# Altium PCB PCBModuleM02.PcbDoc (part 1 of 2)
Units mm, origin at the board's own origin, x right, y up, seen from the top; angles counter-clockwise.
Board outline 149.86 x 99.06 mm, 2 copper layers (Top Layer, Bottom Layer); 167 components, 166 nets, 568 pads, 73 vias.
Unrouted connection lines stored in the file: 37.
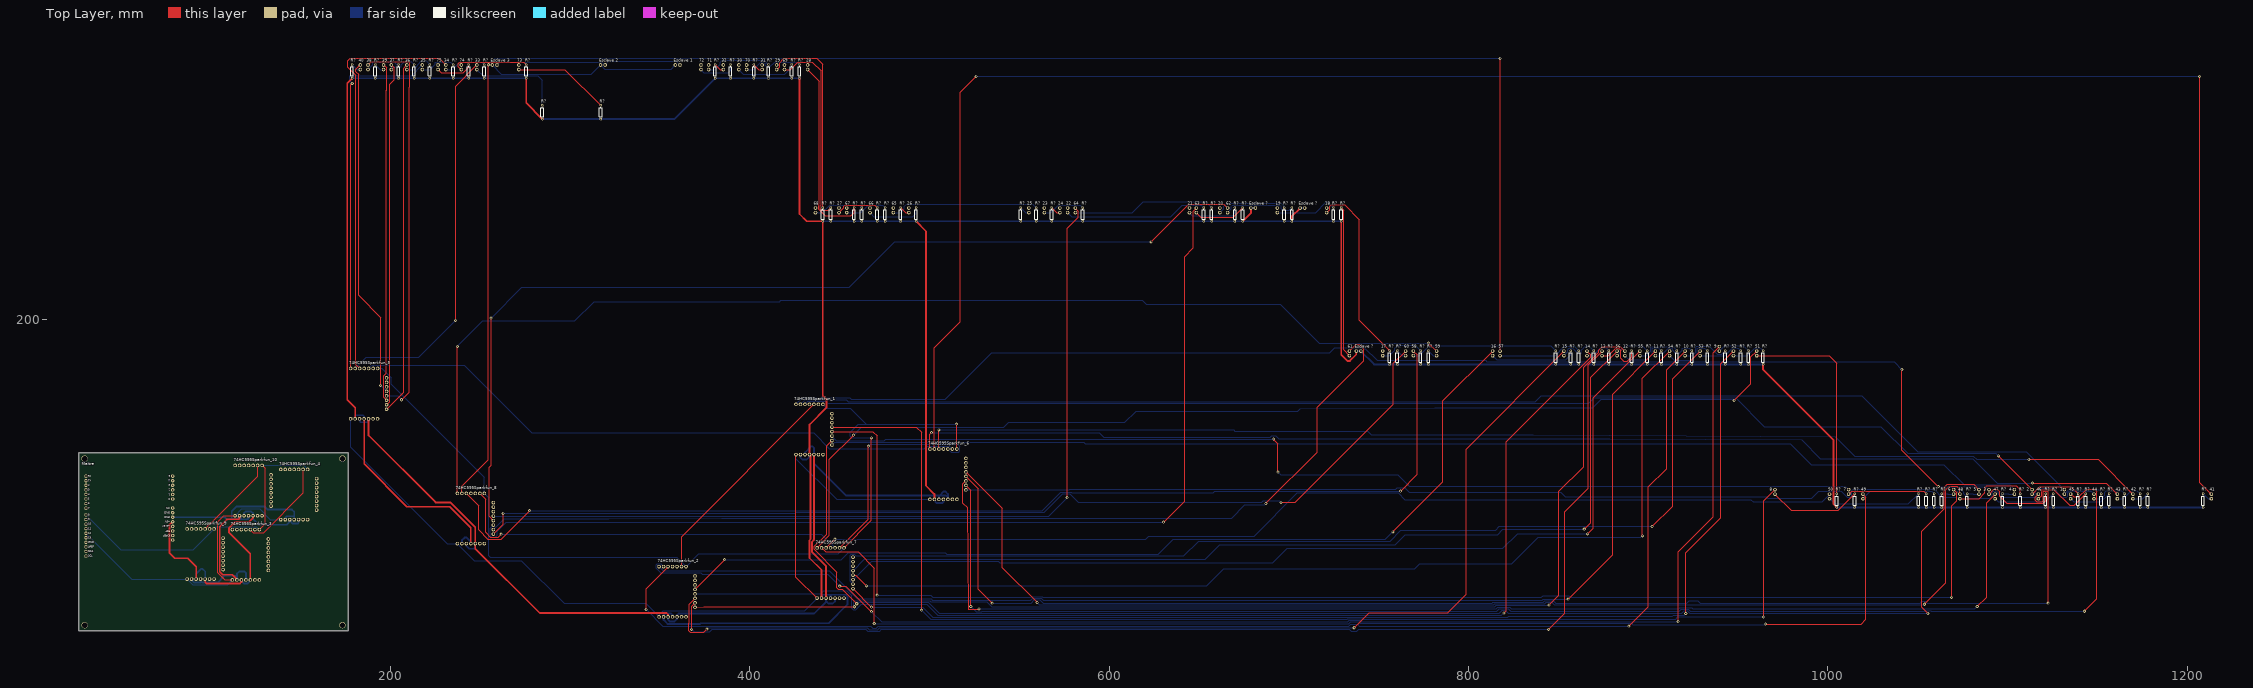
[diagram p0: Top Layer view]
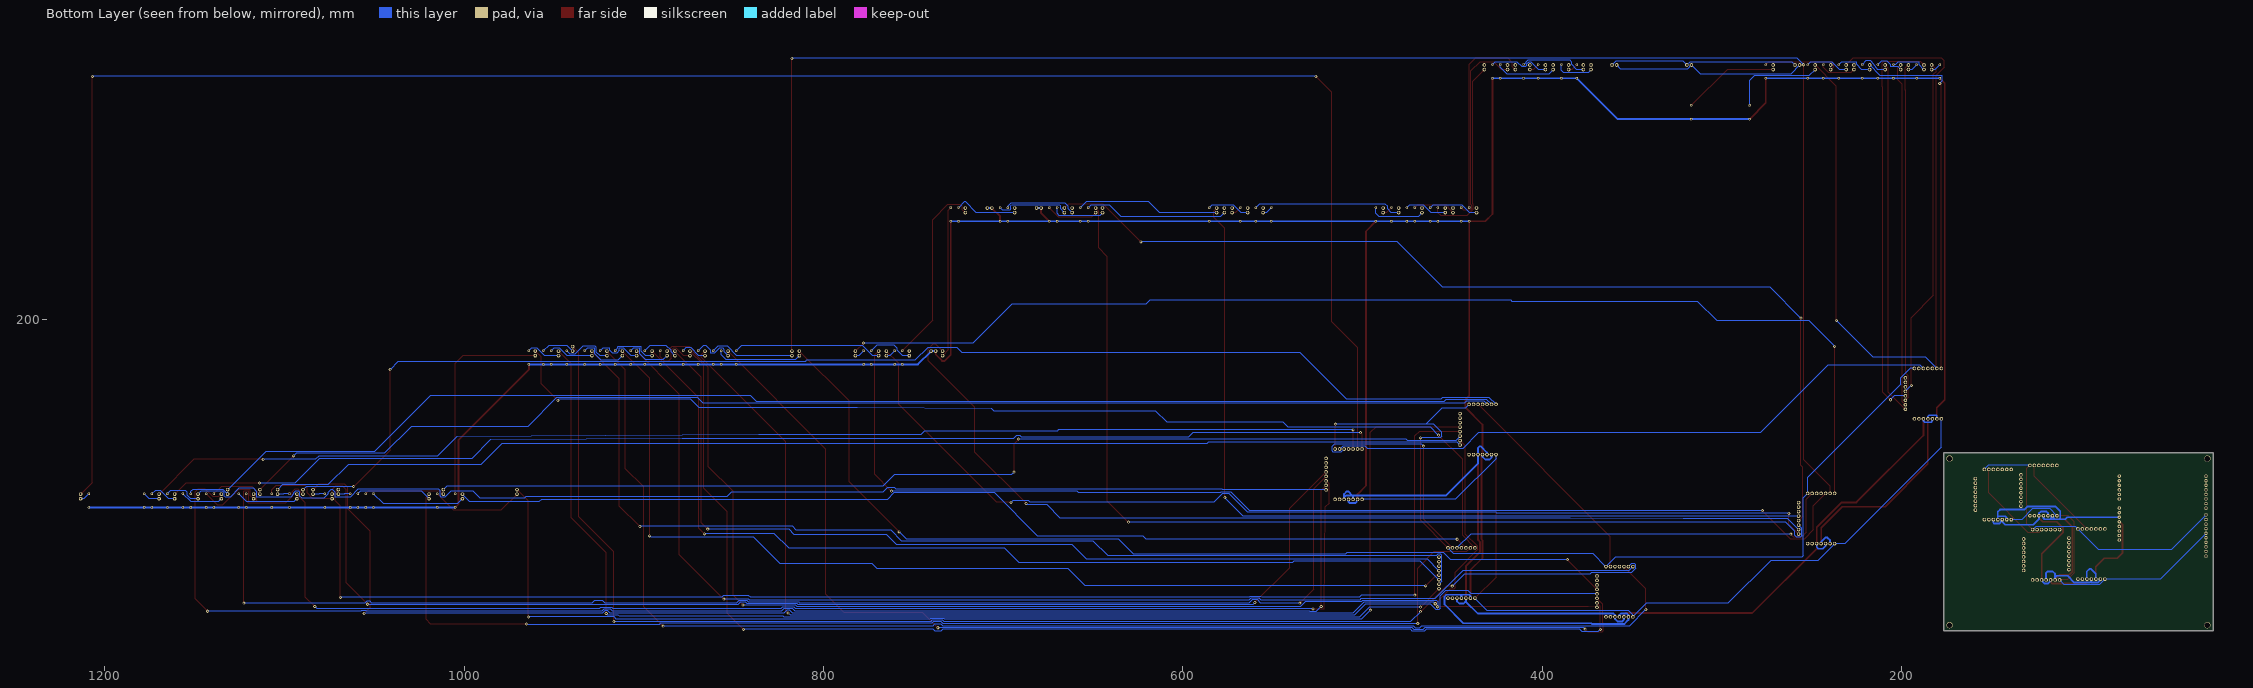
[diagram p1: Bottom Layer view, seen from below]

## Layer stack, top to bottom
Top Solder: solder mask 0.0102, Solder Resist, Dk 3.5
Top Layer: signal copper 0.0356
Dielectric 1: dielectric 0.32, FR-4, Dk 4.8
Bottom Layer: signal copper 0.0356
Bottom Solder: solder mask 0.0102, Solder Resist, Dk 3.5

## Board outline
26.67,26.67 176.53,26.67 176.53,125.73 26.67,125.73

## Design rules (kind name [scope] priority, off if disabled: settings)
Clearance Clearance_plan [(InPoly)] p1: gap=1.1
Clearance [All] p2: gap=0.4
PolygonConnect [All] p1: connectstyle=Relief reliefconductorwidth=0.254 reliefentries=4 polygonreliefangle="90 Angle" airgapwidth=0.254
RoutingVias [All] p1: holewidth=0.8 width=1.7 viastyle="Through Hole" minholewidth=0.8 minwidth=1.7 maxholewidth=0.8 maxwidth=1.7
SolderMaskExpansion [All] p1: expansion=0.102
Width Width_Puissance [(InNet('VCC') OR InNet('GND'))] p1: maxlimit=2 minlimit=1 preferedwidth=1
Width [All] p2: maxlimit=0.5 minlimit=0.4 preferedwidth=0.5
30 further rules are at their usual default settings.

## Classes and differential pairs
component class SchemaM02: 1 2 3 4 5 6 7 8 9 10 11 12 13 14 15 16 17 18 19 20 21 22 23 24 25 26 27 28 29 30 31 32 33 34 35 36 37 38 39 40 41 42 43 44 45 46 47 48 49 50 51 52 53 54 55 56 57 58 59 60 61 62 63 64 65 66 67 68 69 70 71 72 73 74 74HC595Sparkfun_1 74HC595Sparkfun_2 74HC595Sparkfun_3 74HC595Sparkfun_4 74HC595Sparkfun_5 74HC595Sparkfun_6 74HC595Sparkfun_7 74HC595Sparkfun_8 74HC595Sparkfun_9 74HC595Sparkfun_10 75 "Esclave 1" "Esclave 2" "Esclave 3" "Esclave ?" Maître R?

## Components (designator, comment, footprint, x,y, rotation, side; value= is the part's Value field where it differs from the comment)
1 "Embase_CI_2_contacts" Embase_CI_2_contacts 1131.697,102.743 r0 top
2 "Embase_CI_2_contacts" Embase_CI_2_contacts 1113.79,102.743 r0 top
3 "Embase_CI_2_contacts" Embase_CI_2_contacts 1089.787,102.743 r0 top
4 "Embase_CI_2_contacts" Embase_CI_2_contacts 1103.884,102.743 r0 top
5 "Embase_CI_2_contacts" Embase_CI_2_contacts 1084.199,102.743 r0 top
6 "Embase_CI_2_contacts" Embase_CI_2_contacts 1070.102,102.743 r0 top
7 "Embase_CI_2_contacts" Embase_CI_2_contacts 1011.682,102.743 r0 top
8 "Embase_CI_2_contacts" Embase_CI_2_contacts 970.661,102.743 r0 top
9 "Embase_CI_2_contacts" Embase_CI_2_contacts 939.673,182.372 r0 top
10 "Embase_CI_2_contacts" Embase_CI_2_contacts 920.623,179.832 r0 top
11 "Embase_CI_2_contacts" Embase_CI_2_contacts 904.113,179.832 r0 top
12 "Embase_CI_2_contacts" Embase_CI_2_contacts 887.095,179.832 r0 top
13 "Embase_CI_2_contacts" Embase_CI_2_contacts 874.395,179.832 r0 top
14 "Embase_CI_2_contacts" Embase_CI_2_contacts 866.013,179.832 r0 top
15 "Embase_CI_2_contacts" Embase_CI_2_contacts 853.186,179.832 r0 top
16 "Embase_CI_2_contacts" Embase_CI_2_contacts 813.562,179.832 r0 top
17 "Embase_CI_2_contacts" Embase_CI_2_contacts 752.348,179.832 r0 top
18 "Embase_CI_2_contacts" Embase_CI_2_contacts 721.106,259.461 r0 top
19 "Embase_CI_2_contacts" Embase_CI_2_contacts 693.674,259.461 r0 top
20 "Embase_CI_2_contacts" Embase_CI_2_contacts 661.67,259.461 r0 top
21 "Embase_CI_2_contacts" Embase_CI_2_contacts 644.779,259.461 r0 top
22 "Embase_CI_2_contacts" Embase_CI_2_contacts 576.961,259.461 r0 top
23 "Embase_CI_2_contacts" Embase_CI_2_contacts 564.007,259.461 r0 top
24 "Embase_CI_2_contacts" Embase_CI_2_contacts 572.643,259.461 r0 top
25 "Embase_CI_2_contacts" Embase_CI_2_contacts 555.371,259.461 r0 top
26 "Embase_CI_2_contacts" Embase_CI_2_contacts 488.569,259.461 r0 top
27 "Embase_CI_2_contacts" Embase_CI_2_contacts 449.707,259.461 r0 top
28 "Embase_CI_2_contacts" Embase_CI_2_contacts 432.308,339.09 r0 top
29 "Embase_CI_2_contacts" Embase_CI_2_contacts 415.036,339.09 r0 top
30 "Embase_CI_2_contacts" Embase_CI_2_contacts 393.954,339.09 r0 top
31 "Embase_CI_2_contacts" Embase_CI_2_contacts 406.908,339.09 r0 top
32 "Embase_CI_2_contacts" Embase_CI_2_contacts 385.318,339.09 r0 top
33 "Embase_CI_2_contacts" Embase_CI_2_contacts 248.158,339.09 r0 top
34 "Embase_CI_2_contacts" Embase_CI_2_contacts 230.886,339.09 r0 top
35 "Embase_CI_2_contacts" Embase_CI_2_contacts 217.805,339.09 r0 top
36 "Embase_CI_2_contacts" Embase_CI_2_contacts 209.169,339.09 r0 top
37 "Embase_CI_2_contacts" Embase_CI_2_contacts 200.533,339.09 r0 top
38 "Embase_CI_2_contacts" Embase_CI_2_contacts 187.579,339.09 r0 top
39 "Embase_CI_2_contacts" Embase_CI_2_contacts 196.215,339.09 r0 top
40 "Embase_CI_2_contacts" Embase_CI_2_contacts 183.261,339.09 r0 top
41 "Embase_CI_2_contacts" Embase_CI_2_contacts 1213.485,100.203 r0 top
42 "Embase_CI_2_contacts" Embase_CI_2_contacts 1169.797,100.203 r0 top
43 "Embase_CI_2_contacts" Embase_CI_2_contacts 1161.161,100.203 r0 top
44 "Embase_CI_2_contacts" Embase_CI_2_contacts 1148.207,100.203 r0 top
45 "Embase_CI_2_contacts" Embase_CI_2_contacts 1135.253,100.203 r0 top
46 "Embase_CI_2_contacts" Embase_CI_2_contacts 1117.219,100.203 r0 top
47 "Embase_CI_2_contacts" Embase_CI_2_contacts 1093.216,100.203 r0 top
48 "Embase_CI_2_contacts" Embase_CI_2_contacts 1073.531,100.203 r0 top
49 "Embase_CI_2_contacts" Embase_CI_2_contacts 1019.556,100.203 r0 top
50 "Embase_CI_2_contacts" Embase_CI_2_contacts 1001.014,100.203 r0 top
51 "Embase_CI_2_contacts" Embase_CI_2_contacts 960.501,179.832 r0 top
52 "Embase_CI_2_contacts" Embase_CI_2_contacts 947.547,179.832 r0 top
53 "Embase_CI_2_contacts" Embase_CI_2_contacts 929.005,179.832 r0 top
54 "Embase_CI_2_contacts" Embase_CI_2_contacts 911.987,179.832 r0 top
55 "Embase_CI_2_contacts" Embase_CI_2_contacts 895.477,179.832 r0 top
56 "Embase_CI_2_contacts" Embase_CI_2_contacts 882.777,179.832 r0 top
57 "Embase_CI_2_contacts" Embase_CI_2_contacts 817.626,179.832 r0 top
58 "Embase_CI_2_contacts" Embase_CI_2_contacts 769.366,179.832 r0 top
59 "Embase_CI_2_contacts" Embase_CI_2_contacts 782.32,179.832 r0 top
60 "Embase_CI_2_contacts" Embase_CI_2_contacts 765.048,179.832 r0 top
61 "Embase_CI_2_contacts" Embase_CI_2_contacts 733.806,179.832 r0 top
62 "Embase_CI_2_contacts" Embase_CI_2_contacts 665.988,259.461 r0 top
63 "Embase_CI_2_contacts" Embase_CI_2_contacts 648.589,259.461 r0 top
64 "Embase_CI_2_contacts" Embase_CI_2_contacts 581.279,259.461 r0 top
65 "Embase_CI_2_contacts" Embase_CI_2_contacts 479.933,259.461 r0 top
66 "Embase_CI_2_contacts" Embase_CI_2_contacts 466.979,259.461 r0 top
67 "Embase_CI_2_contacts" Embase_CI_2_contacts 454.025,259.461 r0 top
68 "Embase_CI_2_contacts" Embase_CI_2_contacts 436.626,259.461 r0 top
69 "Embase_CI_2_contacts" Embase_CI_2_contacts 419.354,339.09 r0 top
70 "Embase_CI_2_contacts" Embase_CI_2_contacts 398.272,339.09 r0 top
71 "Embase_CI_2_contacts" Embase_CI_2_contacts 377.19,339.09 r0 top
72 "Embase_CI_2_contacts" Embase_CI_2_contacts 372.872,339.09 r0 top
73 "Embase_CI_2_contacts" Embase_CI_2_contacts 271.526,339.09 r0 top
74 "Embase_CI_2_contacts" Embase_CI_2_contacts 239.522,339.09 r0 top
74HC595Sparkfun_1 "74HC595" 74HC595 440.77,124.781 r90 top
74HC595Sparkfun_2 "74HC595" 74HC595 364.57,34.444 r90 top
74HC595Sparkfun_3 "74HC595" 74HC595 127.08,55.018 r90 top
74HC595Sparkfun_4 "74HC595" 74HC595 154.004,88.546 r90 top
74HC595Sparkfun_5 "74HC595" 74HC595 192.92,144.72 r90 top
74HC595Sparkfun_6 "74HC595" 74HC595 515.319,99.889 r90 top
74HC595Sparkfun_7 "74HC595" 74HC595 452.508,44.898 r90 top
74HC595Sparkfun_8 "74HC595" 74HC595 252.302,75.211 r90 top
74HC595Sparkfun_9 "74HC595" 74HC595 101.934,55.439 r90 top
74HC595Sparkfun_10 "74HC595" 74HC595 128.618,90.745 r90 top
75 "Embase_CI_2_contacts" Embase_CI_2_contacts 226.568,339.09 r0 top
"Esclave 1" "Embase_CI_2_contacts" Embase_CI_2_contacts 361.188,341.63 r90 top
"Esclave 2" "Embase_CI_2_contacts" Embase_CI_2_contacts 319.532,341.63 r90 top
"Esclave 3" "Embase_CI_2_contacts" Embase_CI_2_contacts 259.334,341.63 r90 top
"Esclave ?" "Embase_CI_2_contacts" Embase_CI_2_contacts 740.156,182.372 r90 top (schematic designator "Esclave 4")
"Esclave ?" "Embase_CI_2_contacts" Embase_CI_2_contacts 681.482,262.001 r90 top (schematic designator "Esclave 6")
"Esclave ?" "Embase_CI_2_contacts" Embase_CI_2_contacts 708.914,262.001 r90 top (schematic designator "Esclave 5")
Maître "Arduino" UNO_R3_SHIELD 28.067,58.166 r0 top
R? "Res1" AXIAL-0.3 440.69,258.445 r90 top (schematic designator R29)
R? "Res1" AXIAL-0.3 458.089,258.445 r90 top (schematic designator R28)
R? "Res1" AXIAL-0.3 471.043,258.445 r90 top (schematic designator R27)
R? "Res1" AXIAL-0.3 483.997,258.445 r90 top (schematic designator R26)
R? "Res1" AXIAL-0.3 550.799,258.445 r90 top (schematic designator R25)
R? "Res1" AXIAL-0.3 568.071,258.445 r90 top (schematic designator R24)
R? "Res1" AXIAL-0.3 585.343,258.445 r90 top (schematic designator R23)
R? "Res1" AXIAL-0.3 652.78,258.445 r90 top (schematic designator R22)
R? "Res1" AXIAL-0.3 670.052,258.445 r90 top (schematic designator R21)
R? "Res1" AXIAL-0.3 916.051,178.816 r90 top (schematic designator R55)
R? "Res1" AXIAL-0.3 933.069,178.816 r90 top (schematic designator R54)
R? "Res1" AXIAL-0.3 951.611,178.816 r90 top (schematic designator R53)
R? "Res1" AXIAL-0.3 964.057,178.816 r90 top (schematic designator R52)
R? "Res1" AXIAL-0.3 1005.078,99.187 r90 top (schematic designator R51)
R? "Res1" AXIAL-0.3 1050.544,99.187 r90 top (schematic designator R50)
R? "Res1" AXIAL-0.3 1059.18,99.187 r90 top (schematic designator R49)
R? "Res1" AXIAL-0.3 1107.186,99.187 r90 top (schematic designator R48)
R? "Res1" AXIAL-0.3 1125.601,99.187 r90 top (schematic designator R47)
R? "Res1" AXIAL-0.3 1143.635,99.187 r90 top (schematic designator R46)
R? "Res1" AXIAL-0.3 1156.589,99.187 r90 top (schematic designator R45)
R? "Res1" AXIAL-0.3 1165.225,99.187 r90 top (schematic designator R44)
R? "Res1" AXIAL-0.3 1173.861,99.187 r90 top (schematic designator R43)
R? "Res1" AXIAL-0.3 1178.179,99.187 r90 top (schematic designator R42)
R? "Res1" AXIAL-0.3 1208.913,99.187 r90 top (schematic designator R41)
R? "Res1" AXIAL-0.3 178.689,338.074 r90 top (schematic designator R40)
R? "Res1" AXIAL-0.3 191.643,338.074 r90 top (schematic designator R39)
R? "Res1" AXIAL-0.3 204.597,338.074 r90 top (schematic designator R38)
R? "Res1" AXIAL-0.3 213.233,338.074 r90 top (schematic designator R37)
R? "Res1" AXIAL-0.3 221.996,338.074 r90 top (schematic designator R36)
R? "Res1" AXIAL-0.3 243.586,338.074 r90 top (schematic designator R75)
R? "Res1" AXIAL-0.3 275.59,338.074 r90 top (schematic designator R74)
R? "Res1" AXIAL-0.3 317.119,315.341 r90 top (schematic designator R73)
R? "Res1" AXIAL-0.3 389.382,338.074 r90 top (schematic designator R72)
R? "Res1" AXIAL-0.3 410.464,338.074 r90 top (schematic designator R71)
R? "Res1" AXIAL-0.3 427.736,338.074 r90 top (schematic designator R70)
R? "Res1" AXIAL-0.3 445.135,258.445 r90 top (schematic designator R69)
R? "Res1" AXIAL-0.3 462.407,258.445 r90 top (schematic designator R68)
R? "Res1" AXIAL-0.3 475.361,258.445 r90 top (schematic designator R67)
R? "Res1" AXIAL-0.3 492.633,258.445 r90 top (schematic designator R66)
R? "Res1" AXIAL-0.3 559.435,258.445 r90 top (schematic designator R65)
R? "Res1" AXIAL-0.3 657.098,258.445 r90 top (schematic designator R64)
R? "Res1" AXIAL-0.3 674.37,258.445 r90 top (schematic designator R63)
R? "Res1" AXIAL-0.3 701.802,258.445 r90 top (schematic designator R62)
R? "Res1" AXIAL-0.3 729.234,258.445 r90 top (schematic designator R61)
R? "Res1" AXIAL-0.3 760.476,178.816 r90 top (schematic designator R60)
R? "Res1" AXIAL-0.3 777.748,178.816 r90 top (schematic designator R59)
R? "Res1" AXIAL-0.3 848.614,178.816 r90 top (schematic designator R58)
R? "Res1" AXIAL-0.3 861.441,178.816 r90 top (schematic designator R57)
R? "Res1" AXIAL-0.3 899.541,178.816 r90 top (schematic designator R56)
R? "Res1" AXIAL-0.3 697.484,258.445 r90 top (schematic designator R20)
R? "Res1" AXIAL-0.3 724.916,258.445 r90 top (schematic designator R19)
R? "Res1" AXIAL-0.3 756.158,178.816 r90 top (schematic designator R18)
R? "Res1" AXIAL-0.3 773.43,178.816 r90 top (schematic designator R17)
R? "Res1" AXIAL-0.3 856.996,178.816 r90 top (schematic designator R16)
R? "Res1" AXIAL-0.3 869.823,178.816 r90 top (schematic designator R15)
R? "Res1" AXIAL-0.3 878.205,178.816 r90 top (schematic designator R14)
R? "Res1" AXIAL-0.3 890.905,178.816 r90 top (schematic designator R13)
R? "Res1" AXIAL-0.3 907.415,178.816 r90 top (schematic designator R12)
R? "Res1" AXIAL-0.3 924.433,178.816 r90 top (schematic designator R11)
R? "Res1" AXIAL-0.3 942.975,178.816 r90 top (schematic designator R10)
R? "Res1" AXIAL-0.3 955.929,178.816 r90 top (schematic designator R9)
R? "Res1" AXIAL-0.3 1014.984,99.187 r90 top (schematic designator R8)
R? "Res1" AXIAL-0.3 1054.862,99.187 r90 top (schematic designator R7)
R? "Res1" AXIAL-0.3 1063.498,99.187 r90 top (schematic designator R6)
R? "Res1" AXIAL-0.3 1077.595,99.187 r90 top (schematic designator R5)
R? "Res1" AXIAL-0.3 1097.28,99.187 r90 top (schematic designator R4)
R? "Res1" AXIAL-0.3 1121.283,99.187 r90 top (schematic designator R3)
R? "Res1" AXIAL-0.3 1139.317,99.187 r90 top (schematic designator R2)
R? "Res1" AXIAL-0.3 1152.271,99.187 r90 top (schematic designator R1)
R? "Res1" AXIAL-0.3 234.95,338.074 r90 top (schematic designator R35)
R? "Res1" AXIAL-0.3 252.222,338.074 r90 top (schematic designator R34)
R? "Res1" AXIAL-0.3 284.607,315.341 r90 top (schematic designator R33)
R? "Res1" AXIAL-0.3 380.746,338.074 r90 top (schematic designator R32)
R? "Res1" AXIAL-0.3 402.336,338.074 r90 top (schematic designator R31)
R? "Res1" AXIAL-0.3 423.418,338.074 r90 top (schematic designator R30)

## Footprints (in the part's own frame and the unit in brackets; to place one, negate y for a bottom-side part, rotate by r counter-clockwise, add the part's x,y. Pads: shape width x height; smd on the part's side, far side on the other; paste and mask are expansions set on the pad)
74HC595 [mm]
  round 2 hole 1.1: 1(0,0) 2(0,2.5) 3(0,5) 4(0,7.5) 5(0,10) 6(0,12.5) 7(0,15) 8(28,0) 9(28,2.5) 10(28,5) 11(28,7.5) 12(28,10) 13(28,12.5) 14(28,15) 15(5.3,-5) 16(7.8,-5) 17(12.8,-5) 18(10.3,-5) 19(15.3,-5) 20(17.8,-5) 21(20.3,-5) 22(22.8,-5)
AXIAL-0.3 [mm] "Axial Device, Thru-Hole; 2 Leads; 0.3 in Pin Spacing"
  round 1.4 hole 0.85: 1(-3.81,0) 2(3.81,0)
  silkscreen extent -2.77,-0.76 2.77,0.76
Embase_CI_2_contacts [mm]
  round 2 hole 1.1: 1(0,0) 2(0,2.54)
UNO_R3_SHIELD [mil]
  round 74 hole 40: 3.3V(2000,1050) 5V(2000,1150) A0(2000,1650) A1(2000,1750) A2(2000,1850) A3(2000,1950) A4(2000,2050) A5(2000,2150) AREF(100,600) D2(100,1950) D3(100,1850) D4(100,1750) D5(100,1650) D6(100,1550) D7(100,1450) D8(100,1300) D9(100,1200) D10(100,1100) D11(100,1000) D12(100,900) D13(100,800) GND@0(2000,1250) GND@1(2000,1350) GND@2(100,700) IOREF(2000,850) NC(2000,750) RES(2000,950) RX(100,2150) SCL(100,400) SDA(100,500) TX(100,2050) VIN(2000,1450)

## Part data
Maître: library part ARDUINO_R3_SHIELD
R? R? R? R? R? R? R? R? R? R? R? R? R? R? R? R? R? R? R? R? R? R? R? R? R? R? R? R? R? R? R? R? R? R? R? R? R? R? R? R? R? R? R? R? R? R? R? R? R? R? R? R? R? R? R? R? R? R? R? R? R? R? R? R? R? R? R? R? R? R? R? R? R? R? R?: "Resistor"

## Free pads (board coordinates)
  round 3.5 hole 3: 0(29.845,29.845) 1(29.845,122.555) 2(173.355,29.845) 3(173.355,122.555)

## Via types
v1: diameter 1.7, hole 0.8, Top Layer to Bottom Layer, 73 vias

## Nets (pads, with @x,y where several pads share a name; then routed paths per layer and width w, separated by ;. In a path a pad name is that pad's centre, name@x,y a point inside that pad or via, vN(x,y) a via of type N, cw(c..) or ccw(c..) an arc to the next point about the centre after c; other vN are vias at no path point)
GND: 74HC595Sparkfun_1.4 74HC595Sparkfun_1.6 74HC595Sparkfun_2.4 74HC595Sparkfun_2.6 74HC595Sparkfun_3.4 74HC595Sparkfun_3.6 74HC595Sparkfun_4.4 74HC595Sparkfun_4.6 74HC595Sparkfun_5.4 74HC595Sparkfun_5.6 74HC595Sparkfun_6.4 74HC595Sparkfun_6.6 74HC595Sparkfun_7.4 74HC595Sparkfun_7.6 74HC595Sparkfun_8.4 74HC595Sparkfun_8.6 74HC595Sparkfun_9.4 74HC595Sparkfun_9.6 74HC595Sparkfun_10.4 74HC595Sparkfun_10.6 "Esclave ?.1" "Esclave ?.2" Maître.GND@0 R?.1 | length 2347.5
  Top Layer w1: 74HC595Sparkfun_3.6@114.58,55.018 113.995,55.603 113.995,55.88 111.989,57.887 106.68,57.887 105.029,59.538 105.029,84.654 109.22,88.845 115.519,88.845 116.118,89.444 74HC595Sparkfun_10.6@116.118,90.745 ; R?.1@178.689,334.264 175.997,331.572 175.997,155.245 180.42,150.821 74HC595Sparkfun_5.6@180.42,144.72 ; 74HC595Sparkfun_5.4@185.42,144.72 185.42,119.609 209.245,95.783 233.02,95.783 244.802,84.001 74HC595Sparkfun_8.4@244.802,75.211 ; R?.1@275.59,334.264 275.59,320.548 R?.1@284.607,311.531 ; R?.1@427.736,334.264 427.736,258.699 431.8,254.635 R?.1@440.69,254.635 440.69,157.505 442.671,155.524 442.671,150.876 433.27,141.475 74HC595Sparkfun_1.4@433.27,124.781 433.857,124.781 433.857,77.647 433.308,77.098 433.308,67.224 440.008,60.524 74HC595Sparkfun_7.6@440.008,44.898 ; R?.1@492.633,254.635 498.145,249.123 498.145,107.467 502.819,102.793 74HC595Sparkfun_6.6@502.819,99.889 ; R?.1@674.37,254.635 678.942,259.207 678.942,262.001 ; R?.1@701.802,254.635 701.802,257.429 706.374,262.001 ; R?.1@729.234,254.635 729.234,180.34 732.663,176.911 734.06,176.911 737.616,180.467 737.616,182.372 ; R?.1@964.057,175.006 964.057,172.06 1003.173,132.944 1003.173,97.282 R?.1@1005.078,95.377
  Bottom Layer w1: 78.867,89.916 107.747,89.916 108.839,88.824 112.395,88.824 ; 74HC595Sparkfun_9.6@89.434,55.439 89.941,55.439 89.941,54.381 90.805,53.518 94.434,53.518 94.434,54.334 ; 74HC595Sparkfun_9.4@94.434,55.439 94.434,54.334 ; 74HC595Sparkfun_3.6@114.58,55.018 114.58,56.515 ; 74HC595Sparkfun_3.4@119.58,55.018 119.58,59.007 118.897,59.69 115.85,59.69 114.58,58.42 114.58,56.515 ; 74HC595Sparkfun_10.4@121.118,90.745 121.118,89.535 ; 74HC595Sparkfun_4.6@141.504,88.546 141.504,89.739 142.24,90.475 146.199,90.475 146.504,90.17 ; 74HC595Sparkfun_4.4@146.504,88.546 146.504,90.17 ; R?.1@178.689,334.264 R?.1@191.643,334.264 R?.1@204.597,334.264 R?.1@213.233,334.264 R?.1@221.996,334.264 R?.1@234.95,334.264 R?.1@243.586,334.264 R?.1@252.222,334.264 R?.1@275.59,334.264 ; 74HC595Sparkfun_5.6@180.42,144.72 180.42,146.634 184.785,146.634 185.42,145.999 74HC595Sparkfun_5.4@185.42,144.72 ; 74HC595Sparkfun_8.6@239.802,75.211 239.802,77.09 241.3,78.588 242.57,78.588 244.802,76.356 74HC595Sparkfun_8.4@244.802,75.211 ; R?.1@284.607,311.531 R?.1@317.119,311.531 358.013,311.531 R?.1@380.746,334.264 R?.1@389.382,334.264 R?.1@402.336,334.264 R?.1@410.464,334.264 R?.1@423.418,334.264 R?.1@427.736,334.264 ; 74HC595Sparkfun_2.4@357.07,34.444 357.07,35.56 356.283,36.347 352.857,36.347 352.07,35.56 74HC595Sparkfun_2.6@352.07,34.444 352.07,32.765 354.33,30.505 372.288,30.505 372.72,30.937 443.967,30.937 454.431,41.402 454.431,45.771 453.39,46.812 445.77,46.812 445.008,46.05 ; 74HC595Sparkfun_1.6@428.27,124.781 428.27,123.037 429.26,122.047 431.8,122.047 433.27,123.517 74HC595Sparkfun_1.4@433.27,124.781 ; 74HC595Sparkfun_7.6@440.008,44.898 440.008,46.13 440.69,46.812 445.008,46.812 445.008,46.05 ; R?.1@440.69,254.635 R?.1@445.135,254.635 R?.1@458.089,254.635 R?.1@462.407,254.635 R?.1@471.043,254.635 R?.1@475.361,254.635 R?.1@483.997,254.635 R?.1@492.633,254.635 R?.1@550.799,254.635 R?.1@559.435,254.635 R?.1@568.071,254.635 R?.1@585.343,254.635 R?.1@652.78,254.635 R?.1@657.098,254.635 R?.1@670.052,254.635 R?.1@674.37,254.635 R?.1@697.484,254.635 R?.1@701.802,254.635 R?.1@724.916,254.635 R?.1@729.234,254.635 ; 74HC595Sparkfun_7.4@445.008,44.898 445.008,46.05 ; 74HC595Sparkfun_6.6@502.819,99.889 503.326,99.889 503.326,98.425 503.961,97.79 507.184,97.79 507.819,98.425 74HC595Sparkfun_6.4@507.819,99.889 ; 678.942,262.001 681.482,262.001 ; 706.374,262.001 708.914,262.001 ; 737.616,182.372 740.156,182.372 747.522,175.006 R?.1@756.158,175.006 R?.1@760.476,175.006 R?.1@773.43,175.006 R?.1@777.748,175.006 R?.1@848.614,175.006 R?.1@856.996,175.006 R?.1@861.441,175.006 R?.1@869.823,175.006 R?.1@878.205,175.006 R?.1@890.905,175.006 R?.1@899.541,175.006 R?.1@907.415,175.006 R?.1@916.051,175.006 R?.1@924.433,175.006 R?.1@933.069,175.006 R?.1@942.975,175.006 R?.1@951.611,175.006 R?.1@955.929,175.006 R?.1@964.057,175.006 ; R?.1@1005.078,95.377 R?.1@1014.984,95.377 R?.1@1050.544,95.377 R?.1@1054.862,95.377 R?.1@1059.18,95.377 R?.1@1063.498,95.377 R?.1@1077.595,95.377 R?.1@1097.28,95.377 R?.1@1107.186,95.377 R?.1@1121.283,95.377 R?.1@1125.601,95.377 R?.1@1139.317,95.377 R?.1@1143.635,95.377 R?.1@1152.271,95.377 R?.1@1156.589,95.377 R?.1@1165.225,95.377 R?.1@1173.861,95.377 R?.1@1178.179,95.377 R?.1@1208.913,95.377 ; 94.434,54.334 95.25,53.518 103.835,53.518 107.645,57.328 113.767,57.328 114.58,56.515 ; 112.395,88.824 111.709,89.51 111.709,93.243 114.3,95.834 130.035,95.834 131.724,94.145 145.221,94.145 146.504,92.862 146.504,90.17 ; 112.395,88.824 114.808,88.824 ; 114.808,88.824 115.519,89.535 115.519,90.146 74HC595Sparkfun_10.6@116.118,90.745 116.713,90.745 116.713,89.535 117.424,88.824 ; 114.808,88.824 117.424,88.824 ; 117.424,88.824 120.407,88.824 ; 120.407,88.824 121.118,89.535 ; 120.407,88.824 120.752,88.824 121.118,89.19 121.118,89.535
Net1_1: 1.1 R?.2@1152.271,102.997 | length 23.9
  Bottom Layer w0.5: 1.1@1131.697,102.743 1131.697,103.633 1132.38,103.633 1134.056,105.308 1151.255,105.308 1152.271,104.292 R?.2@1152.271,102.997
Net1_2: 1.2 74HC595Sparkfun_1.13 | length 728
  Bottom Layer w0.5: 74HC595Sparkfun_1.13@428.27,152.781 430.835,155.346 453.695,155.346 454.863,154.178 837.133,154.178 840.486,157.531 1019.023,157.531 1050.138,126.416 1110.564,126.416 1.2@1131.697,105.283
Net2_1: 2.1 R?.2@1139.317,102.997 | length 28.9
  Top Layer w0.5: 2.1@1113.79,102.743 1117.981,106.934 1135.38,106.934 R?.2@1139.317,102.997
Net2_2: 2.2 74HC595Sparkfun_1.12 | length 706.7
  Top Layer w0.5: v1(1095.019,124.054) 2.2@1113.79,105.283
  Bottom Layer w0.5: 74HC595Sparkfun_1.12@430.77,152.781 432.421,154.432 442.417,154.432 443.586,153.264 866.927,153.264 870.153,156.489 948.69,156.489 964.819,140.36 1029.614,140.36 1044.524,125.451 1093.622,125.451 v1(1095.019,124.054)
Net3_1: 3.1 R?.2@1121.283,102.997 | length 41.9
  Top Layer w0.5: 3.1@1089.787,102.743 1092.53,105.486 1094.486,105.486 1095.832,104.14 1095.832,101.6 1099.779,97.653 1119.941,97.653 1121.283,98.995 R?.2@1121.283,102.997
Net3_2: 3.2 74HC595Sparkfun_1.14 | length 736.8
  Top Layer w0.5: v1(1041.273,172.06) 1041.273,127.33 v1(1061.593,107.01)
  Bottom Layer w0.5: 74HC595Sparkfun_1.14@425.77,152.781 429.505,156.516 455.629,156.516 456.51,155.634 508.923,155.634 534.81,181.521 722.795,181.521 725.602,184.328 742.188,184.328 749.3,177.216 809.676,177.216 810.362,176.53 886.181,176.53 886.333,176.378 1036.955,176.378 v1(1041.273,172.06) ; v1(1061.593,107.01) 1088.06,107.01 3.2@1089.787,105.283
Net4_1: 4.1 R?.2@1097.28,102.997 | length 6.7
  Bottom Layer w0.5: R?.2@1097.28,102.997 1100.455,102.997 1100.709,102.743 4.1@1103.884,102.743
Net4_2: 4.2 74HC595Sparkfun_1.15 | length 669.6
  Bottom Layer w0.5: 74HC595Sparkfun_1.15@445.77,130.081 447.286,131.597 586.029,131.597 586.74,130.886 979.272,130.886 990.905,119.253 1064.565,119.253 1075.893,107.925 1101.242,107.925 4.2@1103.884,105.283
Net5_1: 5.1 R?.2@1077.595,102.997 | length 6.7
  Bottom Layer w0.5: R?.2@1077.595,102.997 1080.77,102.997 1081.024,102.743 5.1@1084.199,102.743
Net5_2: 5.2 74HC595Sparkfun_1.16 | length 805.7
  Top Layer w0.5: 74HC595Sparkfun_1.16@445.77,132.581 442.773,129.584 442.773,80.575 435.858,73.66 435.858,72.04 448.466,59.432 448.466,50.8 449.396,49.87 451.475,49.87 v1(459.588,41.758) ; v1(1055.726,36.449) 1052.297,39.878 1052.297,82.144 1064.87,94.717 1064.87,106.68 1066.444,108.255 1081.227,108.255 5.2@1084.199,105.283
  Bottom Layer w0.5: v1(459.588,41.758) 460.362,42.532 499.29,42.532 505.423,36.398 817.142,36.398 818.845,38.101 820.572,38.101 822.276,36.398 918.691,36.398 920.115,37.822 921.866,37.822 923.29,36.398 1055.675,36.398 v1(1055.726,36.449)
Net6_1: 6.1 R?.2@1063.498,102.997 | length 6.7
  Bottom Layer w0.5: R?.2@1063.498,102.997 1066.673,102.997 1066.927,102.743 6.1@1070.102,102.743
Net6_2: 6.2 74HC595Sparkfun_1.17 | length 776.4
  Top Layer w0.5: 74HC595Sparkfun_1.17@445.77,137.581 468.565,137.581 470.916,135.23 v1(470.916,46.533) ; v1(1068.934,45.263) 1068.934,96.19 1071.753,99.009 1071.753,103.632 6.2@1070.102,105.283
  Bottom Layer w0.5: v1(470.916,46.533) 500.687,46.533 501.957,45.263 556.137,45.263 556.643,45.769 562.737,45.769 563.243,45.263 840.691,45.263 841.576,46.148 855.956,46.148 856.841,45.263 v1(1068.934,45.263)
Net7_1: 7.1 R?.2@1054.862,102.997 | length 44.5
  Top Layer w0.5: 7.1@1011.682,102.743 1013.358,104.419 1053.44,104.419 R?.2@1054.862,102.997
Net7_2: 7.2 74HC595Sparkfun_1.18 | length 588.3
  Top Layer w0.5: v1(691.515,133.452) 694.03,130.937 v1(694.03,115.062)
  Bottom Layer w0.5: 74HC595Sparkfun_1.18@445.77,135.081 448.263,132.588 474.828,132.588 475.691,133.452 v1(691.515,133.452) ; v1(694.03,115.062) 695.604,113.487 760.73,113.487 767.055,107.163 1009.802,107.163 7.2@1011.682,105.283
Net8_1: 8.1 R?.2@1014.984,102.997 | length 51.9
  Top Layer w0.5: 8.1@970.661,102.743 979.653,93.751 1005.738,93.751 R?.2@1014.984,102.997
Net8_2: 8.2 74HC595Sparkfun_1.19 | length 695.1
  Top Layer w0.5: 74HC595Sparkfun_1.19@445.77,140.081 492.785,140.081 495.706,137.16 v1(495.706,38.202) ; v1(964.362,34.392) 964.362,98.984 8.2@970.661,105.283
  Bottom Layer w0.5: v1(495.706,38.202) 500.761,33.147 732.673,33.147 732.936,33.41 740.601,33.41 740.864,33.147 915.291,33.147 916.535,34.392 v1(964.362,34.392)
Net9_1: 9.1 R?.2@955.929,182.626 | length 18.7
  Bottom Layer w0.5: 9.1@939.673,182.372 942.746,185.445 953.11,185.445 R?.2@955.929,182.626
Net9_2: 9.2 74HC595Sparkfun_2.13 | length 751.4
  Top Layer w0.5: v1(450.139,51.613) 453.542,51.613 v1(467.792,37.363) ; v1(916.788,31.775) 916.788,70.739 936.244,90.195 936.244,181.483 9.2@939.673,184.912
  Bottom Layer w0.5: 74HC595Sparkfun_2.13@352.07,62.444 350.404,64.11 348.615,64.11 347.904,63.398 347.904,61.595 350.52,58.979 372.77,58.979 373.558,58.191 443.56,58.191 v1(450.139,51.613) ; v1(467.792,37.363) 473.38,31.775 732.847,31.775 733.582,32.51 739.701,32.51 740.435,31.775 v1(916.788,31.775)
Net10_1: 10.1 R?.2@942.975,182.626 | length 28.7
  Bottom Layer w0.5: 10.1@920.623,179.832 924.408,179.832 926.455,181.879 926.455,184.462 927.1,185.107 934.169,185.107 938.554,180.722 941.071,180.722 R?.2@942.975,182.626
Net10_2: 10.2 74HC595Sparkfun_2.12 | length 747.5
  Top Layer w0.5: v1(342.316,38.583) 342.316,50.19 74HC595Sparkfun_2.12@354.57,62.444 ; v1(889.33,29.312) 900.227,40.208 900.227,106.959 910.285,117.018 910.285,172.034 10.2@920.623,182.372
  Bottom Layer w0.5: v1(342.316,38.583) 351.587,29.312 467.47,29.312 468.555,28.227 470.471,28.227 471.555,29.312 733.498,29.312 734.433,30.246 738.365,30.246 739.299,29.312 v1(889.33,29.312)
Net11_1: 11.1 R?.2@924.433,182.626 | length 26.3
  Bottom Layer w0.5: 11.1@904.113,179.832 907.035,179.832 911.225,184.022 913.637,184.022 913.637,182.88 915.263,181.254 917.346,181.254 918.972,182.88 918.972,184.023 923.036,184.023 R?.2@924.433,182.626
Net11_2: 11.2 74HC595Sparkfun_2.14 | length 672.9
  Top Layer w0.5: v1(855.526,44.377) 880.237,69.088 880.237,158.496 11.2@904.113,182.372
  Bottom Layer w0.5: 74HC595Sparkfun_2.14@349.57,62.444 352.019,59.995 444.398,59.995 459.96,44.434 500.986,44.434 501.579,43.84 556.515,43.84 557.543,44.869 562.343,44.869 563.371,43.84 841.069,43.84 841.606,44.377 v1(855.526,44.377)
Net12_1: 12.1 R?.2@907.415,182.626 | length 26.4
  Bottom Layer w0.5: 12.1@887.095,179.832 889.432,177.495 899.008,177.495 902.463,180.951 902.463,184.022 906.019,184.022 R?.2@907.415,182.626
Net12_2: 12.2 74HC595Sparkfun_2.15 | length 650.4
  Top Layer w0.5: 74HC595Sparkfun_2.15@369.57,39.744 374.555,40.081 v1(458.318,40.081) ; v1(844.906,41.072) 850.392,46.558 850.392,104.267 864.184,118.059 864.184,173.434 872.496,181.746 872.496,182.861 874.557,184.922 884.545,184.922 12.2@887.095,182.372
  Bottom Layer w0.5: v1(458.318,40.081) 458.019,40.379 458.019,42.882 458.671,43.534 500.086,43.534 500.82,42.799 531.952,42.799 534.695,40.056 814.763,40.056 815.509,40.801 844.635,40.801 v1(844.906,41.072)
Net13_1: 13.1 R?.2@890.905,182.626 | length 28.4
  Top Layer w0.5: 13.1@874.395,179.832 877.825,179.832 882.015,184.022 883.692,184.022 884.936,182.778 884.936,178.283 886.46,176.759 888.517,176.759 890.905,179.146 R?.2@890.905,182.626
Net13_2: 13.2 74HC595Sparkfun_2.16 | length 662.6
  Top Layer w0.5: v1(367.716,27.508) 367.716,40.39 74HC595Sparkfun_2.16@369.57,42.244 ; v1(844.702,27.508) 853.77,36.576 853.77,93.015 866.699,105.943 866.699,174.676 13.2@874.395,182.372
  Bottom Layer w0.5: v1(367.716,27.508) 369.09,26.134 377.656,26.134 379.031,27.508 464.59,27.508 465.67,26.427 472.271,26.427 473.351,27.508 733.829,27.508 734.897,26.44 737.897,26.44 738.965,27.508 v1(844.702,27.508)
Net14_1: 14.1 R?.2@878.205,182.626 | length 14.6
  Bottom Layer w0.5: 14.1@866.013,179.832 869.417,179.832 873.735,184.15 876.681,184.15 R?.2@878.205,182.626
Net14_2: 14.2 74HC595Sparkfun_2.17 | length 630.2
  Top Layer w0.5: v1(819.709,36.601) 820.979,37.871 820.979,131.877 868.045,178.943 868.045,180.34 14.2@866.013,182.372
  Bottom Layer w0.5: 74HC595Sparkfun_2.17@369.57,47.244 439.471,47.244 441.35,49.124 453.997,49.124 456.794,46.327 456.794,39.37 457.606,38.557 459.105,38.557 461.982,41.434 498.578,41.434 504.68,35.331 818.439,35.331 v1(819.709,36.601)
Net15_1: 15.1 R?.2@869.823,182.626 | length 24.1
  Bottom Layer w0.5: 15.1@853.186,179.832 855.243,181.889 855.243,183.261 855.98,183.998 858.114,183.998 860.857,181.254 862.813,181.254 862.813,182.88 865.353,185.42 867.029,185.42 R?.2@869.823,182.626
Net15_2: 15.2 74HC595Sparkfun_2.18 | length 619.8
  Top Layer w0.5: 74HC595Sparkfun_2.18@369.57,44.744 366.395,41.569 366.395,31.166 366.192,30.963 366.192,26.67 366.878,25.984 374.498,25.984 v1(376.149,27.635) ; v1(736.397,28.41) 744.741,36.754 788.518,36.754 798.703,46.939 798.703,127.889 15.2@853.186,182.372
  Bottom Layer w0.5: v1(376.149,27.635) 376.923,28.41 465.488,28.41 466.57,27.327 471.371,27.327 472.453,28.41 v1(736.397,28.41)
Net16_1: 16.1 R?.2@856.996,182.626 | length 47.7
  Bottom Layer w0.5: 16.1@813.562,179.832 815.746,177.648 854.304,177.648 856.996,180.34 R?.2@856.996,182.626
Net16_2: 16.2 74HC595Sparkfun_2.19 | length 526
  Top Layer w0.5: 74HC595Sparkfun_2.19@369.57,49.744 v1(386.095,66.269) ; v1(757.936,81.788) 785.825,109.677 785.825,154.635 16.2@813.562,182.372
  Bottom Layer w0.5: v1(386.095,66.269) 450.978,66.269 454.958,70.248 508.713,70.248 509.594,69.367 627.431,69.367 635.787,77.724 753.872,77.724 v1(757.936,81.788)
Net17_1: 17.1 R?.2@773.43,182.626 | length 25.3
  Bottom Layer w0.5: 17.1@752.348,179.832 756.056,179.832 759.104,182.88 759.104,183.998 760.628,185.522 770.534,185.522 R?.2@773.43,182.626
Net17_2: 17.2 74HC595Sparkfun_3.13
Net18_1: 18.1 R?.2@756.158,182.626 | length 104.3
  Top Layer w0.5: 18.1@721.106,259.461 722.757,261.112 722.757,262.89 723.621,263.754 731.114,263.754 739.292,255.575 739.292,199.492 R?.2@756.158,182.626
Net18_2: 18.2 74HC595Sparkfun_3.12
Net19_1: 19.1 R?.2@724.916,262.255 | length 35
  Bottom Layer w0.5: 19.1@693.674,259.461 715.01,259.461 720.979,265.43 721.741,265.43 R?.2@724.916,262.255
Net19_2: 19.2 74HC595Sparkfun_3.14
Net20_1: 20.1 R?.2@697.484,262.255 | length 40.1
  Bottom Layer w0.5: 20.1@661.67,259.461 663.829,261.62 663.829,262.89 665.49,264.551 695.96,264.551 697.484,263.027 R?.2@697.484,262.255
Net20_2: 20.2 74HC595Sparkfun_3.15
Net21_1: 21.1 R?.2@670.052,262.255 | length 29.7
  Bottom Layer w0.5: 21.1@644.779,259.461 646.43,257.81 668.782,257.81 670.052,259.08 R?.2@670.052,262.255
Net21_2: 21.2 74HC595Sparkfun_3.16
Net22_1: 22.1 R?.2@652.78,262.255 | length 80
  Bottom Layer w0.5: 22.1@576.961,259.461 579.145,257.277 634.314,257.277 640.715,263.677 651.358,263.677 R?.2@652.78,262.255
Net22_2: 22.2 74HC595Sparkfun_3.17
Net23_1: 23.1 R?.2@585.343,262.255 | length 23.7
  Bottom Layer w0.5: 23.1@564.007,259.461 567.563,259.461 571.754,263.652 583.946,263.652 R?.2@585.343,262.255
Net23_2: 23.2 74HC595Sparkfun_3.18
Net24_1: 24.1 R?.2@568.071,262.255 | length 5.7
  Top Layer w0.5: R?.2@568.071,262.255 570.865,259.461 24.1@572.643,259.461
Net24_2: 24.2 74HC595Sparkfun_3.19
Net25_1: 25.1 R?.2@550.799,262.255 | length 5.7
  Bottom Layer w0.5: R?.2@550.799,262.255 553.593,259.461 25.1@555.371,259.461
Net25_2: 25.2 74HC595Sparkfun_4.13
Net26_1: 26.1 R?.2@483.997,262.255 | length 5.7
  Top Layer w0.5: R?.2@483.997,262.255 486.791,259.461 26.1@488.569,259.461
Net26_2: 26.2 74HC595Sparkfun_4.12
Net27_1: 27.1 R?.2@471.043,262.255 | length 24.1
  Top Layer w0.5: 27.1@449.707,259.461 452.374,262.128 452.374,262.89 453.136,263.652 469.646,263.652 R?.2@471.043,262.255
Net27_2: 27.2 74HC595Sparkfun_4.14
Net28_1: 28.1 R?.2@458.089,262.255 | length 105.3
  Top Layer w0.5: 28.1@432.308,339.09 438.785,332.613 438.785,264.505 438.44,264.16 438.44,261.228 441.96,257.708 456.286,257.708 458.089,259.512 R?.2@458.089,262.255
Net28_2: 28.2 74HC595Sparkfun_4.15